# EAGLE board STM32f030 (EAGLE 9.4.1)
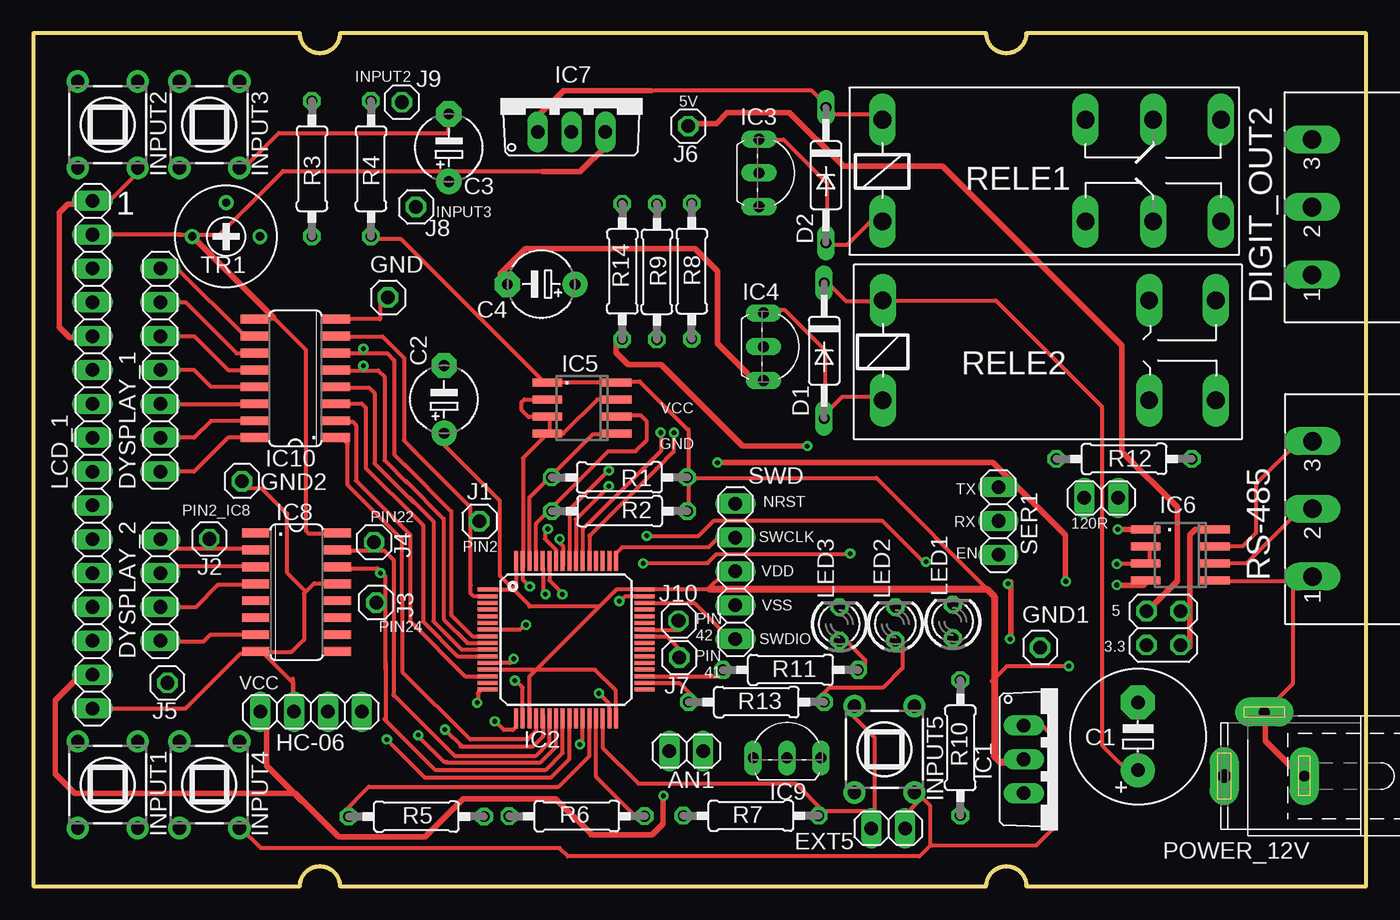
[diagram p0: board, top side]
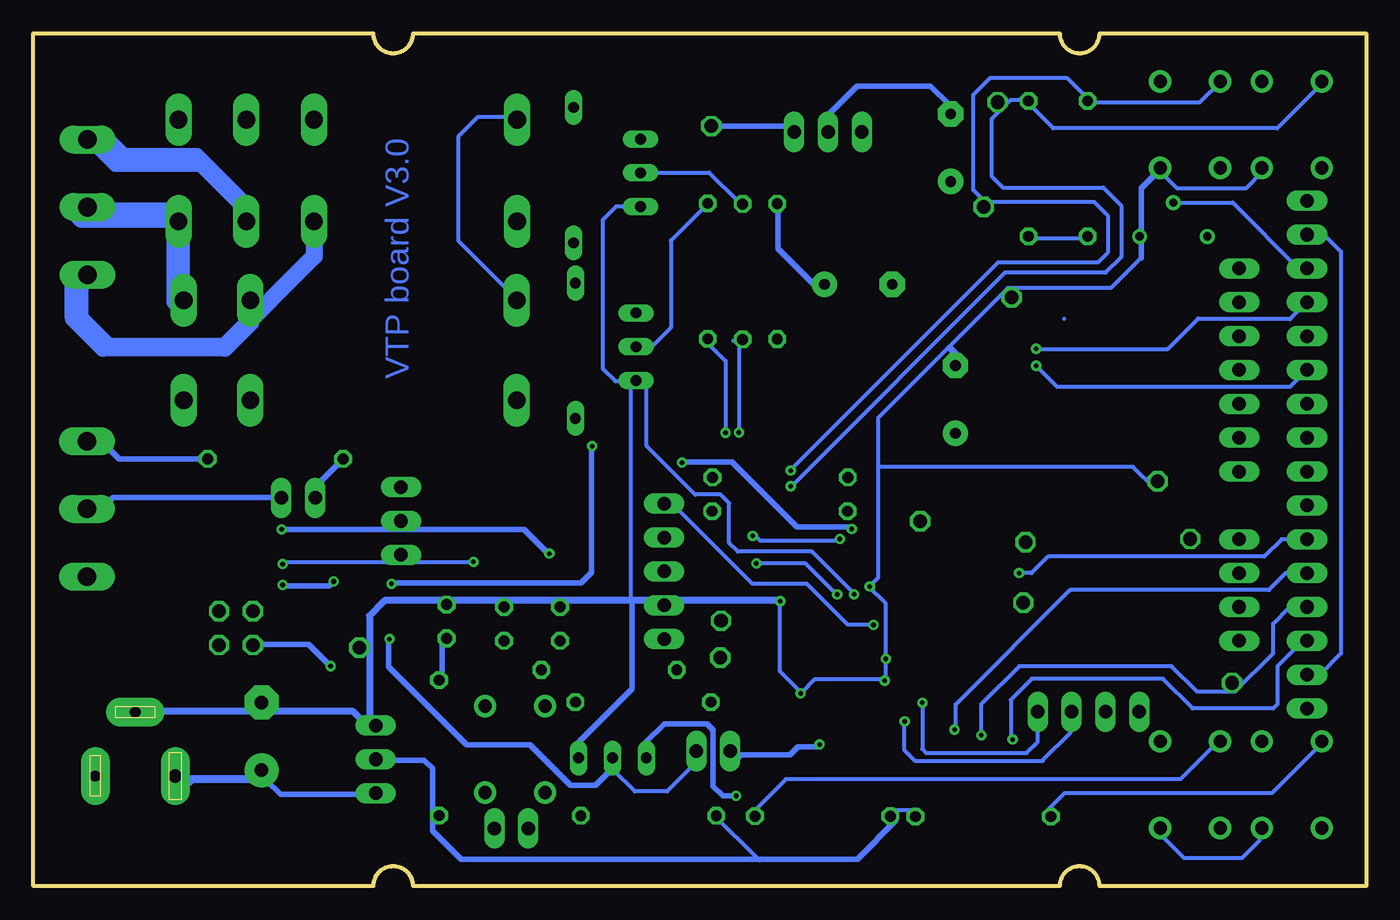
[diagram p1: board, bottom side, seen from below]

Size 100 x 64 mm. Coordinates in mm from the lower left corner, seen from the top.
Outline: 0,0 20,0 arc-180 23,0 71.5,0 arc-180 74.5,0 100,0 100,64 74.5,64 arc-180 71.5,64 23,64 arc-180 20,64 0,64 0,0
Copper layers (1*16): Top 0.035mm / dielectric 1.5mm / Bottom 0.035mm
Design rules "default": minimum track width 6mil, minimum drill 0.35mm, track to track 6mil, track to pad 6mil, pad to pad 6mil, via to via 6mil, smd to smd 6mil, copper to edge 40mil, drill to drill 6mil, minimum pad ring 10mil, minimum via ring 8mil, stop-mask expansion 4mil, vias tented up to drill 0mil, thermal gap 10mil

## Footprints (pad centres in the part's own frame; a part is rotated, then mirrored left to right if it is on the bottom)
1X02 = drill 1.016 long: 1 -1.27,0; 2 1.27,0
E5-10,5 = drill 1.016 pad 2.54: + -2.54,0 | drill 1.016 pad 2.54 octagon: - 2.54,0
E5-5 = drill 0.813 pad 1.905: + -2.54,0 | drill 0.813 pad 1.905 octagon: - 2.54,0
C2992 = drill 0.813 long: A 5.08,0; C -5.08,0
MSTBA3 = drill 1.397 long: 1 -5.08,5.08; 2 0,5.08; 3 5.08,5.08
1X07 = drill 1.016 long: 1 -7.62,0; 2 -5.08,0; 3 -2.54,0; 4 0,0; 5 2.54,0; 6 5.08,0; 7 7.62,0
1X04 = drill 1.016 long: 1 -3.81,0; 2 -1.27,0; 3 1.27,0; 4 3.81,0
2X02 = drill 1.016 octagon: 1 -1.27,-1.27; 2 -1.27,1.27; 3 1.27,-1.27; 4 1.27,1.27
1X01 = drill 1.016 octagon: 1 0,0
TO220AV = drill 1.016 long: 1 -2.54,-2.54; 2 0,-2.54; 3 2.54,-2.54
LQFP64 = smd 1.5 x 0.3: 1 -5.9,3.75; 2 -5.9,3.25; 3 -5.9,2.75; 4 -5.9,2.25; 5 -5.9,1.75; 6 -5.9,1.25; 7 -5.9,0.75; 8 -5.9,0.25; 9 -5.9,-0.25; 10 -5.9,-0.75; 11 -5.9,-1.25; 12 -5.9,-1.75; 13 -5.9,-2.25; 14 -5.9,-2.75; 15 -5.9,-3.25; 16 -5.9,-3.75; 33 5.9,-3.75; 34 5.9,-3.25; 35 5.9,-2.75; 36 5.9,-2.25; 37 5.9,-1.75; 38 5.9,-1.25; 39 5.9,-0.75; 40 5.9,-0.25; 41 5.9,0.25; 42 5.9,0.75; 43 5.9,1.25; 44 5.9,1.75; 45 5.9,2.25; 46 5.9,2.75; 47 5.9,3.25; 48 5.9,3.75 | smd 0.3 x 1.5: 17 -3.75,-5.9; 18 -3.25,-5.9; 19 -2.75,-5.9; 20 -2.25,-5.9; 21 -1.75,-5.9; 22 -1.25,-5.9; 23 -0.75,-5.9; 24 -0.25,-5.9; 25 0.25,-5.9; 26 0.75,-5.9; 27 1.25,-5.9; 28 1.75,-5.9; 29 2.25,-5.9; 30 2.75,-5.9; 31 3.25,-5.9; 32 3.75,-5.9; 49 3.75,5.9; 50 3.25,5.9; 51 2.75,5.9; 52 2.25,5.9; 53 1.75,5.9; 54 1.25,5.9; 55 0.75,5.9; 56 0.25,5.9; 57 -0.25,5.9; 58 -0.75,5.9; 59 -1.25,5.9; 60 -1.75,5.9; 61 -2.25,5.9; 62 -2.75,5.9; 63 -3.25,5.9; 64 -3.75,5.9
TO92- = drill 0.813 long: 1 2.54,0; 2 0,0; 3 -2.54,0
SO8 = smd 0.6 x 2.2: 1 -1.905,-2.6; 2 -0.635,-2.6; 3 0.635,-2.6; 4 1.905,-2.6; 5 1.905,2.6; 6 0.635,2.6; 7 -0.635,2.6; 8 -1.905,2.6
SOIC8 = smd 0.6 x 2.2: 1 -1.905,-2.6; 2 -0.635,-2.6; 3 0.635,-2.6; 4 1.905,-2.6; 5 1.905,2.6; 6 0.635,2.6; 7 -0.635,2.6; 8 -1.905,2.6
SO16 = smd 0.66 x 2.032: 1 -4.445,-3.073; 2 -3.175,-3.073; 3 -1.905,-3.073; 4 -0.635,-3.073; 5 0.635,-3.073; 6 1.905,-3.073; 7 3.175,-3.073; 8 4.445,-3.073; 9 4.445,3.073; 10 3.175,3.073; 11 1.905,3.073; 12 0.635,3.073; 13 -0.635,3.073; 14 -1.905,3.073; 15 -3.175,3.073; 16 -4.445,3.073
TL1105SP = drill 1 pad 1.676: 1 -2.25,3.25; 2 2.25,3.25; 3 -2.25,-3.25; 4 2.25,-3.25
1X16 = drill 1.016 long: 1 -19.05,0; 2 -16.51,0; 3 -13.97,0; 4 -11.43,0; 5 -8.89,0; 6 -6.35,0; 7 -3.81,0; 8 -1.27,0; 9 1.27,0; 10 3.81,0; 11 6.35,0; 12 8.89,0; 13 11.43,0; 14 13.97,0; 15 16.51,0; 16 19.05,0
LED3MM = drill 0.813 octagon: A -1.27,0; K 1.27,0
SPC4077 = drill 0.8 pad 2.184 long: 1 -3,0; 2 0,-4.8 | drill 1 pad 2.184 long: 3 3,0
0207/10 = drill 0.813 octagon: 1 -5.08,0; 2 5.08,0
F4052 = drill 1.321 long: 1 -3.81,3.81; 2 -3.81,-3.81; O1 11.43,-3.81; O2 11.43,3.81; P1 16.51,-3.81; P2 16.51,3.81; S1 21.59,-3.81; S2 21.59,3.81
G2R2A = drill 1.321 long: 1 -2.54,-3.683; 2 -2.54,3.81; P1 17.45,3.81; P2 17.45,-3.683; S1 22.454,3.81; S2 22.454,-3.683
1X03 = drill 1.016 long: 1 -2.54,0; 2 0,0; 3 2.54,0
1X05 = drill 1.016 long: 1 -5.08,0; 2 -2.54,0; 3 0,0; 4 2.54,0; 5 5.08,0
RTRIM3339P = drill 0.61: 1 -2.54,0; 2 0,-2.54; 3 2.54,0

## Placement (x,y rotation side)
120R  [1X02]  80.12,29.13 0 top
AN1  [1X02]  48.99,10.13 0 top
C1  [E5-10,5]  82.88,11.24 90 top
C2  [E5-5]  30.82,36.53 90 top
C3  [E5-5]  31.18,55.41 90 top
C4  [E5-5]  38.11,45.17 180 top
D1  [C2992]  59.33,40.18 270 top
D2  [C2992]  59.46,53.35 270 top
DIGIT_OUT2  [MSTBA3]  101.02,50.96 90 top
DYSPLAY_1  [1X07]  9.53,38.73 90 top
DYSPLAY_2  [1X04]  9.53,22.23 90 top
E$1  [2X02]  84.79,19.37 90 top
EXT5  [1X02]  64.14,4.34 0 top
GND  [1X01]  26.61,44.18 0 top
GND1  [1X01]  75.54,17.91 0 top
GND2  [1X01]  15.65,30.4 270 top
HC-06  [1X04]  20.84,13.09 180 top
IC1  [TO220AV]  76.85,9.52 270 top
IC2  [LQFP64]  39.97,18.5 0 top
IC3  [TO92-]  54.45,53.53 270 top
IC4  [TO92-]  54.78,40.48 270 top
IC5  [SO8]  41.17,35.88 90 top
IC6  [SOIC8]  86.05,24.86 90 top
IC7  [TO220AV]  40.38,59.15 0 top
IC8  [SO16]  19.75,22.05 270 top
IC9  [TO92-]  56.55,9.62 0 top
IC10  [SO16]  19.66,38.11 90 top
INPUT1  [TL1105SP]  5.58,7.62 180 top
INPUT2  [TL1105SP]  5.58,57.15 180 top
INPUT3  [TL1105SP]  13.2,57.15 180 top
INPUT4  [TL1105SP]  13.2,7.62 180 top
INPUT5  [TL1105SP]  63.86,10.27 180 top
J1  [1X01]  33.47,27.38 0 top
J2  [1X01]  13.2,26.06 0 top
J3  [1X01]  25.72,21.28 270 top
J4  [1X01]  25.56,25.8 270 top
J5  [1X01]  10.06,15.25 180 top
J6  [1X01]  49.14,57.04 180 top
J7  [1X01]  48.47,17.15 180 top
J8  [1X01]  28.71,50.97 0 top
J9  [1X01]  27.64,58.83 0 top
J10  [1X01]  48.41,19.91 0 top
LCD_1  [1X16]  4.45,32.38 90 top
LED1  [LED3MM]  68.99,19.86 90 top
LED2  [LED3MM]  64.68,19.68 90 top
LED3  [LED3MM]  60.48,19.68 90 top
POWER_12V  [SPC4077]  92.35,8.26 180 top
R1  [0207/10]  43.97,30.67 180 top
R2  [0207/10]  43.99,28.14 180 top
R3  [0207/10]  20.9,53.84 270 top
R4  [0207/10]  25.33,53.84 270 top
R5  [0207/10]  28.74,5.23 0 top
R6  [0207/10]  40.78,5.25 0 top
R7  [0207/10]  53.84,5.29 0 top
R8  [0207/10]  49.4,46.15 270 top
R9  [0207/10]  46.79,46.11 270 top
R10  [0207/10]  69.55,10.38 90 top
R11  [0207/10]  56.81,16.23 0 top
R12  [0207/10]  81.84,32.06 0 top
R13  [0207/10]  54.25,13.82 0 top
R14  [0207/10]  44.19,46.13 90 top
RELE1  [F4052]  67.51,53.71 0 top
RELE2  [G2R2A]  66.27,40.16 0 top
RS-485  [MSTBA3]  101.06,28.31 90 top
SER1  [1X03]  72.41,27.41 90 top
SWD  [1X05]  52.68,23.62 90 top
TR1  [RTRIM3339P]  14.46,48.76 180 top

## Library data of the parts
120R AN1 DYSPLAY_1 DYSPLAY_2 E$1 EXT5 GND GND1 GND2 HC-06 J1-J10 LCD_1 SER1 SWD = pinhead
C1-C4 TR1 = rcl
D1 D2 = diode
DIGIT_OUT2 RS-485 = con-phoenix-508
IC1 IC7 = transistor
IC2 = nxp_packages
IC3 IC4 IC9 = transistor-npn
IC5 = analog-devices
IC6 = ref-packages
IC8 IC10 = 45xx
INPUT1-INPUT5 = switch
LED1-LED3 = led
POWER_12V = con-jack
R1-R14 = eagle-ltspice
RELE1 RELE2 = relay

## Nets
S$150: LCD_1.16
S$151: LCD_1.11
S$163: LCD_1.6
S$164: LCD_1.4
S$194: TR1.2
S$202: LCD_1.15
S$206: LCD_1.13

## Tracks (layer width: path | path; a pad name or v marks a point on that pad's centre or on a via)
S$1
  Top 0.305: 43.07,31.13 43.17,31.13
S$2
  Top 0.305: 37.73,12.76 37.73,11.64 37.09,11.01 32.77,11.01 27.72,16.06
S$3
  Top 0.305: 43.8,37.8 38.23,37.8
S$4
  Top 0.305: 38.77,34 38.77,35.16 38.73,35.19 37.16,35.19 37.16,35.2 36.63,35.72 36.63,36.32 36.85,36.53 38.17,36.53
S$5
  Top 0.305: 37.22,24.12 37.22,29.15 41.99,33.92 43.97,33.92 44.02,33.97
S$6
  Top 0.305: 37.72,23.91 37.72,27.21 43.15,32.64 45.19,32.64 46.03,33.48 46.03,34.87 45.58,35.32 43.8,35.32 43.78,35.3
S$7
  Top 0.305: 43.74,37.88 45.49,37.88 49.1,34.28
S$8
  Top 0.305: 38.72,34.1 36.73,32.12 36.73,23.89
S$9
  Top 0.305: 43.7,36.54 42.33,36.54 39.75,33.96 38.55,33.96
S$10
  Top 0.305: 43.72,12.9 43.72,14.69 42.16,16.25 34.14,16.25
S$11
  Bottom 1.016: 88.75,43.18 88.75,50.8 95.46,50.8 95.72,51.06
S$12
  Bottom 1.016: 95.78,56.03 93.86,54.11 87.48,54.11 84.17,50.8
S$13
  Bottom 1.016: 83.67,42.68 85.71,40.64 94.29,40.64 96.37,42.72 96.37,45.64
S$14
  Top 0.305: 32.8,22.08 32.8,28.41 28.27,32.94
S$15
  Top 0.305: 27.95,30.41 30.79,27.57 30.79,20.04 32.57,18.25 34.56,18.25
S$16
  Top 0.305: 27.81,31.68 31.36,28.12 31.36,20.34 32.95,18.75 34.55,18.75
S$17
  Top 0.305: 28.25,29.15 30.02,27.38 30.02,19.88 32.15,17.75 34.43,17.75
S$18
  Top 0.305: 28.45,27.88 29.23,27.11 29.23,19.86 31.84,17.25 34.44,17.25
S$19
  Top 0.305: 16.51,41.27 15.88,41.27 10.79,46.35 9.53,46.35
S$20
  Top 0.305: 36.22,24.02 36.22,22.58 35.89,22.25 34.36,22.25
S$21
  Top 0.305: 48.69,22.25 45.57,22.25
S$22
  Top 0.305: 37.21,21.09 36.05,22.25
S$23  (via drill 0.35)
  other vias: 37.25,22.48
S$24
  Top 0.305: 48.97,30.64 63.24,30.64 71.9,21.98
S$25
  Top 0.305: 36.72,23.84 36.72,23.02 37.24,22.5
S$26  (via drill 0.35)
  other vias: 36.04,17.06
S$27  (via drill 0.35)
  other vias: 36.12,15.43
S$28  (via drill 0.35)
  other vias: 42.43,14.46
S$29  (via drill 0.35)
  other vias: 43.96,21.39
S$30
  Top 0.305: 36.03,17.03 35.75,16.75 34.33,16.75
S$31
  Top 0.305: 36.72,13.04 36.72,14.91 36.17,15.46
S$32
  Top 0.305: 43.22,13 43.22,13.68 42.49,14.41
S$33
  Top 0.305: 45.75,21.75 44.4,21.75 44.02,21.37
S$34
  Bottom 0.305: 37.33,22.49 36.08,21.24 36.08,15.53 41.38,15.53 42.38,14.52 43.96,16.1 43.96,21.35
S$35
  Bottom 0.508: 30.25,39.26 30.25,39.4 31.25,40.41
S$36
  Bottom 0.508: 43.98,21.43 73.65,21.43 74.78,20.3 74.78,11.86
S$37
  Top 0.305: 38.23,12.83 38.23,11.25 37.44,10.47 32.05,10.47
S$38
  Top 0.305: 27.02,14.36 31.59,9.79 37.7,9.79 38.73,10.82 38.73,12.65
S$39
  Top 0.305: 16.51,33.66 14.61,33.66 12.06,31.11 9.53,31.11
S$40
  Top 0.305: 9.53,43.81 11.43,43.81 15.24,40.01 17.14,40.01
S$41
  Top 0.305: 9.53,41.27 12.06,41.27 14.61,38.73 17.14,38.73
S$42
  Bottom 0.305: 10.89,60.42 12.5,58.81 20.94,58.81
S$43
  Bottom 0.305: 3.38,60.18 6.68,56.87 23.49,56.87 25.51,58.9 25.51,58.97
S$44
  Bottom 0.305: 21.02,48.59 25.67,48.59 25.75,48.67
S$45
  Top 0.305: 59.54,58.53 60.16,57.91 63.76,57.91
S$46
  Bottom 0.305: 7.82,53.89 7.82,53.58 9.04,52.35 14.17,52.35 15.62,53.8
S$47
  Bottom 0.406: 15.65,53.63 16.88,52.4 16.88,47.11
S$48
  Top 0.305: 43.18,29.99 40.72,27.53 40.72,23.99
S$49  (via drill 0.35)
  other vias: 43.18,31.18
S$50  (via drill 0.35)
  other vias: 43.18,30.01
S$51
  Top 0.305: 30.94,9.3 38.07,9.3 38.97,10.2 39.22,10.46 39.22,12.72
S$52
  Bottom 0.305: 43.24,31.19 27.6,46.83 20.11,46.83 19.35,47.58 19.35,50.28 20.41,51.34 28.58,51.34 29.48,52.24 29.48,59.38 28.21,60.66 22.46,60.66 20.74,58.94
S$53
  Bottom 0.305: 25.43,58.98 26.68,58.98 27.9,57.77 28.12,57.55 28.12,53.29 27.25,52.42 19.74,52.42
S$54
  Bottom 0.305: 19.73,52.43 18.37,51.07 18.37,47.21 19.55,46.03 27.1,46.03 43.12,30.01
S$55
  Top 0.406: 17.5,12.55 17.5,9.05 20.16,6.39
S$56
  Bottom 0.406: 76.82,31.96 78.96,29.83 78.96,29.08
S$57
  Top 0.305: 16.51,37.47 13.34,37.47 12.06,38.73 9.53,38.73
S$58
  Top 0.305: 9.53,36.2 17.14,36.2
S$59
  Top 0.305: 17.14,34.92 13.34,34.92 12.06,33.66 9.53,33.66
S$60
  Bottom 0.305: 16.87,47.16 19.15,44.88 26.89,44.88 36.62,35.15 36.62,23.14 37.27,22.49
S$61
  Top 0.305: 26,44.3 26,42.55 22.23,42.55
S$62
  Top 0.406: 11.85,48.84 18.02,42.67
S$63
  Top 0.305: 30.25,33.68 35,28.93 35,23.31 36.17,22.13
S$64
  Bottom 0.305: 38.95,19.66 37.05,19.66
S$65
  Top 0.305: 22.5,41.25 26.2,41.25 27.81,39.64 27.81,33.45 28.74,32.52
S$66
  Top 0.305: 22.41,39.99 26.53,39.99 27.08,39.45 27.08,32.41 27.95,31.54
S$67
  Top 0.305: 28.25,26.31 28.25,19.91 32.41,15.75 34.66,15.75
S$68
  Bottom 0.508: 91.29,13.15 76.06,13.15 74.8,11.9
S$69
  Bottom 0.406: 35.27,4.93 38.17,2.03 67.91,2.03 70.04,4.16 70.04,8.84 70.66,9.46 73.53,9.46
S$70
  Top 0.508: 50.73,22.31 71.53,22.31 72.1,21.74 72.1,9.75 72.53,9.32 73.5,9.32 73.5,9.33
S$71
  Top 0.305: 22.85,38.71 25.88,38.71 26.34,38.25 26.34,31.97 28,30.31
S$72
  Top 0.305: 22.58,37.4 25.19,37.4 25.6,36.99 25.6,31.73 28.52,28.81
S$73
  Top 0.305: 22.71,36.23 24.62,36.23 24.95,35.9 24.95,31.37 28.74,27.58
S$74
  Top 0.305: 22.69,34.86 23.94,34.86 24.21,34.59 24.21,30.44 28.27,26.38
S$75
  Top 0.305: 27.67,21.49 27.67,26.03 23.59,30.12 23.59,33.17 23.06,33.69 23.02,33.65 22.59,33.65
S$76
  Top 0.305: 43.16,31.19 40.23,28.25 40.23,24.06
S$77
  Top 0.305: 26.35,12.52 30.14,8.74 38.46,8.74 39.72,10 39.72,12.64
S$78
  Top 0.305: 29.51,8.16 38.84,8.16 40.22,9.54 40.22,12.69
S$79
  Top 0.305: 16.75,25.32 10.18,25.32 9.52,25.98
S$80
  Bottom 0.305: 8.01,4.61 8.01,3.42 9.32,2.11 13.65,2.11 15.62,4.08
S$81
  Bottom 0.305: 35.71,5.72 33.83,5.72
S$82
  Bottom 0.305: 11.03,10.93 13.93,8.03 43.55,8.03 45.98,5.59
S$83
  Bottom 0.305: 3.42,10.64 7.09,6.97 22.63,6.97 24.21,5.39
S$84
  Bottom 0.406: 31.29,58.63 32.7,60.04 38.19,60.04 40.47,57.77
S$85
  Top 0.305: 75.07,11.97 75.78,11.97 76.59,11.17 76.59,4.4 75.23,3.04 67.28,3.04 66.47,2.23 40.12,2.23 39.5,2.85 17.08,2.85 15.57,4.36
S$86
  Top 0.305: 23.19,5.49 25.16,7.46 39.41,7.46 41.72,9.78 41.72,12.95
S$87
  Top 0.305: 45.69,4.73 42.23,8.19 42.23,12.93
S$88
  Bottom 0.305: 63.93,57.69 66.68,57.69 68.13,56.24 68.13,48.46 63.66,43.99
S$89
  Top 0.305: 63.72,43.95 72.22,43.95 80.18,35.98 80.18,10.57 82.78,7.97
S$90
  Top 0.305: 66.28,7.06 67.26,6.07 67.26,3.01
S$91
  Top 0.305: 60.93,13.34 63.12,11.16 63.12,5.61 58.98,5.61
S$92
  Bottom 0.305: 49.17,5.6 45.49,1.91
S$93
  Top 0.305: 42.72,12.86 42.72,10.39 45.4,7.72 57.21,7.72 59.22,5.71
S$94
  Top 0.305: 25.35,48.59 27.55,48.59 38.47,37.66
S$95
  Top 0.305: 63.59,50.66 61.03,48.11 59.5,48.11
S$96
  Top 0.305: 63.45,43.89 60.99,43.89 59.41,45.47
S$97
  Top 0.305: 63.8,36.71 60.68,36.71 59.39,35.42
S$98
  Top 0.305: 54.84,56.02 56.28,56.02 59.55,52.76 59.55,47.89 59.47,47.81
S$99
  Top 0.305: 54.99,43.25 56.35,43.25 59.4,40.21 59.4,35.04
S$100
  Bottom 0.305: 54.5,51.01 56.27,51.01 57.09,50.18 57.28,49.99 57.28,38.84 56.33,37.89 55.19,37.89 55.19,21.35 55.22,21.32
S$101  (via drill 0.35)
  other vias: 47.06,34.04
S$102  (via drill 0.35)
  other vias: 48.06,34.03
S$103
  Bottom 0.406: 87,32.07 93.56,32.07 94.86,33.37
S$104
  Top 0.305: 49.15,34.3 49.15,28.12 49.13,28.1
S$105
  Top 0.305: 47.08,34.07 47.08,32.65 41.86,27.43 41.22,26.79 41.22,23.96
S$106
  Top 0.305: 48.04,33.95 48.04,32.6 46.75,31.32 41.73,26.29 41.73,24.07
S$107
  Bottom 0.305: 54.75,53.56 49.31,53.56 47.06,51.32
S$108
  Bottom 0.305: 47.33,41 47.05,40.72 47.05,34.02
S$109
  Bottom 0.305: 49.43,51.18 52.16,48.45 52.16,41.92 53.6,40.49 54.85,40.49
S$110
  Bottom 0.305: 49.41,40.76 48.05,39.41 48.05,34.01
S$111
  Top 0.305: 45.83,21.25 49.59,21.25 51.9,18.95
S$112
  Top 0.305: 51.73,23.41 50.57,22.25 48.44,22.25
S$113
  Top 0.305: 45.66,22.25 43.75,22.25 42.7,21.21 42.48,20.98 37.22,20.98
S$114
  Top 0.305: 43.71,24.18 43.71,24.97 44.19,25.45 50.68,25.45 51.5,26.27
S$115
  Bottom 0.305: 51.98,28.61 46.08,22.71 41.99,22.71 38.95,19.67
S$116
  Top 0.305: 37.23,13.05 37.23,15.74 42.6,21.11
S$117  (via drill 0.35)
  other vias: 36.96,19.6
S$118
  Top 0.305: 34.29,19.25 36.51,19.25 36.85,19.6
S$119
  Bottom 0.305: 46.72,40.94 47.5,40.94
S$120
  Top 0.406: 35.02,44.63 35.02,45.92 36.92,47.83 49.66,47.83 51.34,46.14 51.34,40.72 54.38,37.68
S$121
  Bottom 1.27: 78.91,49.81 78.91,47.27 85.46,40.72
S$122  (via drill 0.35)
  other vias: 41.01,10.63
S$123
  Top 0.305: 41.22,10.7 41.22,12.99
S$124
  Bottom 0.406: 40.95,10.44 42.65,10.44 43.24,9.85 46.9,9.85 47.62,9.13
S$125
  Bottom 1.27: 83.67,42.32 85.62,40.37 94.79,40.37 97.01,42.59 97.01,46.07
S$126
  Bottom 1.27: 89.36,43.86 89.36,49.87 89.2,50.03 96.37,50.03 96.8,50.45
S$127
  Top 0.305: 94.89,33.34 91.72,30.18 91.72,26.51 90.72,25.5 89.21,25.5
S$128
  Top 0.305: 94.99,28.21 91.01,24.23 89.03,24.23
S$129
  Top 0.305: 83.72,25.61 83.72,24.2 83.68,24.17 81.41,24.17 81.38,24.19
S$130
  Top 0.305: 88.92,22.92 94.49,22.92 94.49,15.2 92.25,12.96
S$131
  Bottom 0.406: 77.65,16.45 79.34,18.14 83.24,18.14
S$132  (via drill 0.35)
  other vias: 77.69,16.51
S$133
  Top 0.406: 49.14,57.24 51.24,57.24 52.06,58.05 56.73,58.05 60.77,54.02 68.22,54.02 81.68,40.55 81.68,32.59 85.81,28.46 85.81,22.89 83.5,20.58 83.08,20.58
S$134
  Top 0.305: 77.72,16.5 73.03,16.5 71.9,15.37
S$135
  Top 0.406: 88.44,26.78 87.18,26.78 86.78,26.37 86.78,17.98 86.72,17.93
S$136
  Top 0.305: 16.68,24.01 10.16,24.01 9.59,23.44
S$137
  Top 0.305: 16.75,22.6 13.84,22.6 12.18,20.94 9.29,20.94 9.22,21.01
S$138
  Top 0.305: 16.56,18.87 13.27,18.87 12.75,18.35 9.72,18.35 9.63,18.44
S$139
  Top 0.305: 16.83,42.58 18.12,42.58 20.43,40.27 20.43,26.68 20.65,26.46 22.99,26.46
S$140
  Top 0.305: 22.58,22.69 21.13,22.69
S$141
  Top 0.305: 16.79,17.56 19.38,17.56 20.29,18.48
S$142
  Top 0.305: 17.18,17.59 19.51,15.26 19.51,13.26
S$143
  Top 0.305: 21.08,22.72 20.31,21.95 20.31,18.48
S$144
  Top 0.305: 22.7,25.19 26.33,25.19 27.04,24.48 27.04,18.43
S$145
  Top 0.305: 22.74,23.86 25.81,23.86 26.41,23.26 26.41,16.29
S$146  (via drill 0.35)
  other vias: 38.42,21.91
S$147
  Bottom 0.305: 15.88,29.84 17.5,31.47 36.62,31.47
S$148
  Top 0.305: 38.23,23.89 38.23,22.1 38.41,21.92
S$149
  Bottom 0.305: 38.44,21.98 41.58,25.12 47.15,25.12 47.79,25.77 47.79,28.74 48.44,29.39 50.35,29.39 53.99,33.03 53.99,37.97
S$150
  Top 0.305: LCD_1.16 5.71,51.44 7.94,53.66
S$151  (via drill 0.35)
  Bottom 0.305: LCD_1.11 5.71,37.47 23.18,37.47 v24.77,39.05
S$152
  Top 0.305: 15.56,53.66 18.41,56.52 31.11,56.52 31.11,57.15
S$153
  Top 0.305: 27.67,21.51 27.67,16.12
S$154
  Top 0.305: 27.03,19.39 27.03,14.29
S$155
  Top 0.305: 26.42,16.87 26.42,12.48
S$156  (via drill 0.35)
  other vias: 26.53,11.01
S$157  (via drill 0.35)
  other vias: 28.88,11.33
S$158  (via drill 0.35)
  other vias: 30.89,11.75
S$159
  Top 0.305: 26.63,10.89 29.36,8.16 29.59,8.16
S$160
  Top 0.305: 28.96,11.19 30.8,9.34 31,9.34
S$161
  Top 0.305: 30.97,11.66 32.08,10.55 32.08,10.51
S$162
  Top 0.305: 59.37,58.74 58.42,59.69 46.35,59.69
S$163  (via drill 0.35)
  Bottom 0.305: LCD_1.6 6.35,26.04 7.65,24.74 23.86,24.74 25.11,23.5 v26.04,23.5
S$164
  Bottom 0.305: 28.89,11.43 28.89,13.65 26.04,16.51 14.61,16.51 12.7,14.61 9.84,14.61 6.99,17.46 6.99,19.68 5.71,20.95 LCD_1.4
S$165
  Top 0.305: 19.47,15.57 19.47,13.22
S$166
  Top 0.305: 4.76,13.34 11.43,13.34 15.56,17.46 17.14,17.46
S$167  (via drill 0.35)
  other vias: 33.3,13.77
S$168  (via drill 0.35)
  other vias: 34.62,12.37
S$169
  Bottom 0.305: 33.31,13.75 33.31,10.3 33.02,10.01 25.47,10.01 25.48,10.01 24.64,10.84 24.64,12.74
S$170
  Bottom 0.305: 34.67,12.37 34.67,10.23 33.85,9.42 33.84,9.43 24.24,9.43
S$171
  Top 0.305: 36.23,12.82 36.23,11.97 35.98,11.72 35.31,11.72 34.64,12.39
S$172
  Top 0.305: 34.34,14.75 33.64,14.75 33.36,14.47 33.36,13.81 33.28,13.74
S$173
  Bottom 0.305: 22.2,12.99 22.2,11.52 24.28,9.44
S$174  (via drill 0.35)
  other vias: 38.6,26.81
S$175  (via drill 0.35)
  other vias: 39.49,26.05
S$176  (via drill 0.35)
  other vias: 39.69,21.89
S$177
  Top 0.305: 39.37,25.87 39.73,25.52 39.73,24.02
S$178
  Top 0.305: 38.38,26.85 38.39,26.84 38.39,26.07 39.23,25.23 39.23,24.24
S$179
  Top 0.305: 38.73,24.21 38.73,22.96 39.75,21.93
S$180
  Bottom 0.305: 39.42,25.91 45.45,25.91 45.87,26.33
S$181  (via drill 0.35)
  other vias: 46.02,26.29
S$182
  Top 0.305: 46,26.28 49.92,26.28 51.07,27.43 63.67,27.43 66.78,24.32 66.84,24.32
S$183  (via drill 0.35)
  other vias: 66.98,24.34
S$184  (via drill 0.35)
  other vias: 81.29,24.17
S$185
  Bottom 0.305: 66.94,24.3 81.35,24.3 81.51,24.14
S$186
  Bottom 0.305: 39.67,21.82 42.06,24.22 45.54,24.22
S$187  (via drill 0.35)
  other vias: 45.76,24.22
S$188
  Top 0.305: 45.8,24.25 50.59,24.25 51.07,24.73 51.26,24.92 61.33,24.92
S$189  (via drill 0.35)
  other vias: 61.29,24.96
S$190
  Top 0.406: 83.61,26.77 81.46,26.77
S$191  (via drill 0.35)
  other vias: 81.37,26.78
S$192
  Bottom 0.406: 61.32,24.9 63.18,26.77 81.52,26.77
S$193
  Bottom 0.406: 51.07,31.82 47.59,31.82 42.71,26.95 38.56,26.95
S$194
  Bottom 0.305: TR1.2 10.02,51.3 5.08,46.35
S$195
  Top 0.406: 51.45,31.79 72,31.79 77.42,26.37 77.42,22.73
S$196  (via drill 0.35)
  other vias: 51.33,31.78
S$197  (via drill 0.35)
  Bottom 0.406: 81.34,22.52 77.82,22.52 v77.47,22.87
S$198  (via drill 0.35)
  other vias: 81.29,22.6
S$199
  Top 0.406: 83.67,22.95 83.27,22.56 81.21,22.56
S$200
  Bottom 0.305: 4.76,23.5 6.03,23.5 7.3,22.23 22.23,22.23 30.8,13.65 30.8,11.75
S$201
  Top 0.305: 10.79,48.9 13.97,48.9 18.73,53.66 38.42,53.66
S$202
  Top 0.305: 11.04,48.91 4.46,48.91 LCD_1.15
  Bottom 0.305: LCD_1.15 3.17,48.9 1.91,47.62 1.91,17.46 3.49,15.88
S$203
  Bottom 0.305: 4.76,18.41 6.67,16.51 6.67,13.65 6.99,13.34 13.02,13.34 15.24,15.56 25.08,15.56 26.67,13.97 26.67,10.79
S$204
  Top 0.305: 45.59,19.25 48.51,19.25 48.65,19.39
S$205  (via drill 0.35)
  other vias: 24.77,40.32
S$206
  Bottom 0.305: LCD_1.13 5.71,42.55
S$207
  Bottom 0.305: 22.67,42.57 22.65,42.58
S$208
  Bottom 0.305: 24.73,40.31 14.89,40.31 12.61,42.59 5.64,42.59
S$209
  Bottom 0.406: 81.47,29.16 94,29.16 94.9,28.26
S$210
  Top 0.305: 66.74,6.69 65.86,5.81 65.86,4.96
S$211
  Bottom 0.61: 82.93,8.03 88.1,8.03 88.71,7.42
S$212
  Bottom 0.406: 69.27,18.74 69.33,18.68 69.33,15.16
S$213
  Top 0.406: 43.71,41.06 43.71,40.06 44.62,39.14 47.1,39.14 53.22,33.02 58.07,33.02
S$214
  Top 0.305: 34.17,21.75 33.03,21.75 32.81,21.98 32.81,22.59 32.81,22.6
S$215
  Bottom 0.305: 50.31,9.25 52.45,7.11 54.87,7.11 56.53,8.77
S$216
  Bottom 0.406: 59.44,10.46 55.08,14.81 55.08,21.4
S$217
  Top 0.305: 45.82,15.75 52.08,15.75 52.15,15.82
S$218
  Top 0.305: 45.94,15.26 48.48,15.26 49.73,14
S$219
  Top 0.406: 92.43,12.82 92.43,10.91 95.16,8.18
S$220
  Bottom 0.406: 74.91,6.89 81.46,6.89 82.52,7.95
S$221
  Top 0.305: 15.88,29.84 17.14,29.84 19.05,27.94 19.05,23.5 20.32,22.23
S$222
  Top 0.305: 45.59,18.75 47.56,18.75 48.61,17.7
S$223
  Top 0.406: 3.68,15.98 1.65,13.94 1.65,8.42 3.1,6.97 19.64,6.97 22.9,3.71 29.4,3.71 32.26,6.57 39.19,6.57 41.87,3.89 41.87,3.88
S$224
  Top 0.406: 41.84,3.86 46.43,3.86 47.26,4.69 47.26,6.79
S$225  (via drill 0.35)
  other vias: 47.27,6.78
S$226
  Bottom 0.406: 54.06,10.79 52.66,12.18 49.46,12.18 48.99,11.71 48.99,7.5 48.27,6.78 47.09,6.78
S$227
  Bottom 1.27: 94.84,56.36 93.26,54.78 87.78,54.78 83.88,50.88 83.72,50.88
S$228
  Top 0.406: 46.33,59.7 39.76,59.7 37.81,57.74
S$229
  Bottom 0.406: 49.19,57.02 43.42,57.02 43.15,57.29
S$230
  Top 0.406: 42.99,55.58 41.01,53.6 38.22,53.6
S$231  (via drill 0.35)
  other vias: 58.07,33.02
S$232
  Top 0.305: 60.9,18.5 62.4,17 62.4,16.02
S$233
  Top 0.305: 65.22,18.59 65.22,16.38 63.74,14.89 59.7,14.89 58.85,14.04
S$234
  Top 0.305: 16.51,42.55 17.14,42.55
S$235
  Bottom 0.406: 56.58,8.79 57.82,7.55 59.69,7.55 62.73,10.6 67.51,10.6 73.36,16.45 73.36,18.32
S$236  (via drill 0.35)
  other vias: 73.28,18.54
S$237  (via drill 0.35)
  other vias: 73.13,22.69
S$238
  Bottom 0.406: 58.12,33.13 58.12,23.55 58.9,22.77 73.21,22.77 73.25,22.73
S$239
  Top 0.406: 73.33,22.82 73.33,18.46
S$240
  Bottom 0.406: 44.11,51.05 44.11,47.84 41.08,44.81
S$242
  Top 0.406: 4.46,51.18 2.58,51.18 1.96,50.55 1.96,41.94 2.72,41.18 4.13,41.18

## Text on the board
Bottom: VTP board V3.0
tNames: INPUT2 | 5V | 1 | INPUT3 | . | VCC | . | GND | TX | PIN2_IC8 | NRST | PIN22 | RX | . | . | SWCLK | PIN2 | EN | VDD | VSS | 5 | PIN24 | PIN / 42 | PIN / 41 | SWDIO | 3.3 | VCC